# EAGLE board MPPT_Charger_20A (EAGLE 7.7.0)
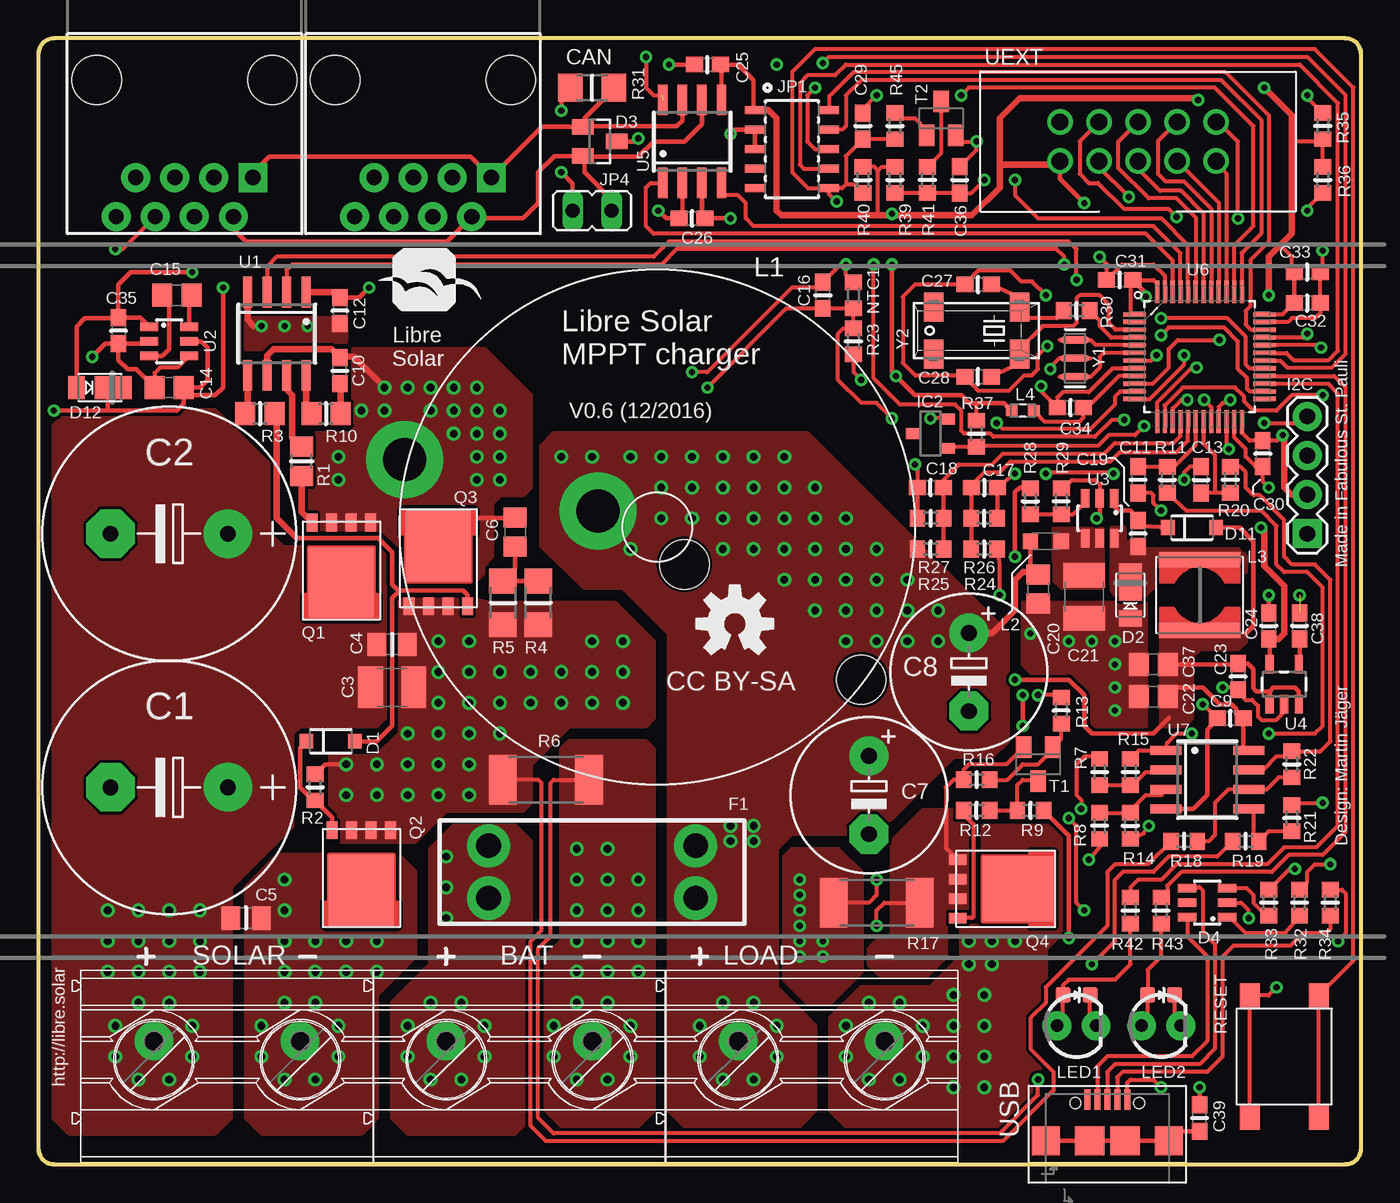
[diagram p0: board, top side]
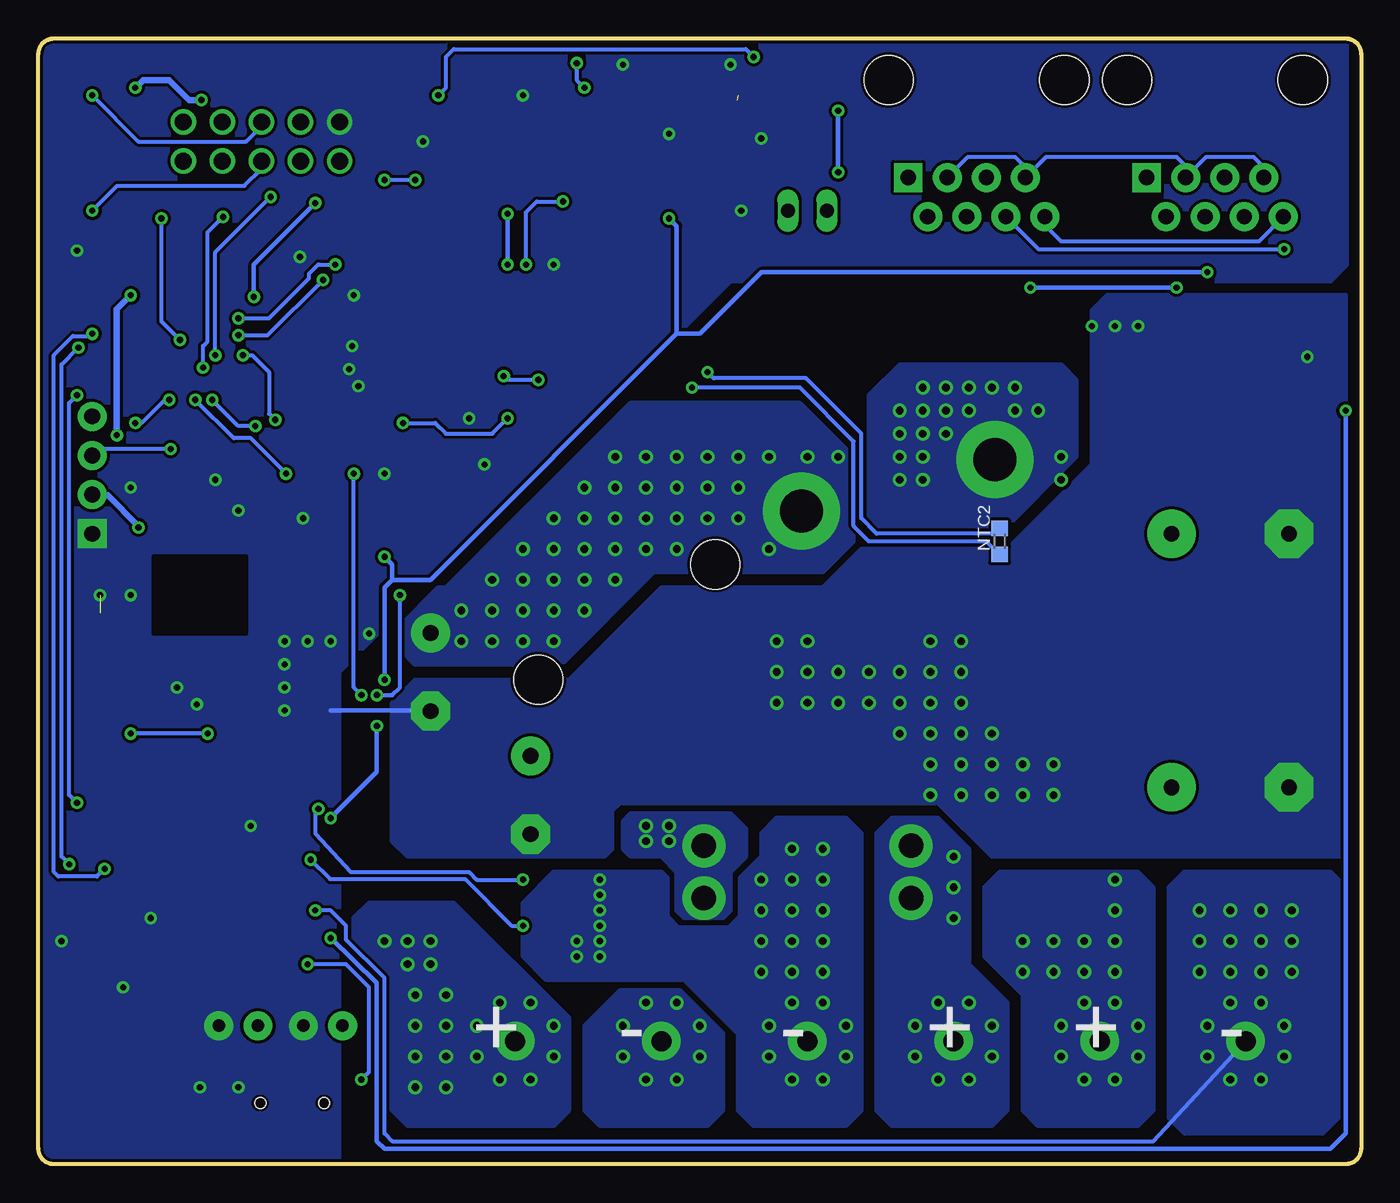
[diagram p1: board, bottom side, seen from below]

Size 86 x 73.2 mm. Coordinates in mm from the lower left corner, seen from the top.
Outline: 86,1 86,72.2 arc90 85,73.2 1,73.2 arc90 0,72.2 0,1 arc90 1,0 85,0 arc90 86,1
Copper layers (1*16): Top 0.035mm / dielectric 1.55mm / Bottom 0.035mm
Design rules "Multi-CB_2L_200um-Tracks_OL70um": minimum track width 0.2mm, minimum drill 0.2mm, track to track 0.2mm, track to pad 0.2mm, pad to pad 0.2mm, via to via 0.2mm, smd to smd 0mil, copper to edge 0.2mm, drill to drill 0.2mm, minimum pad ring 0.2mm, minimum via ring 0.2mm, stop-mask expansion 2mil, vias tented up to drill 0.45mm, thermal gap 0.2mm
Net classes: 1 power: width 0.305 mm, drill 0.3 mm, clearance 0.152 mm; 2 VIN: width 0.203 mm, drill 0.3 mm, clearance 0.152 mm
Holes 3.2 mm at 53.5,31.5 42,39
bRestrict: area 72.5,34.5 to 78.5,39.5

## Footprints (pad centres in the part's own frame; a part is rotated, then mirrored left to right if it is on the bottom)
MKDS_5/2-952 = drill 1.3 pad 2.5: 1 0,0; 2 9.5,0
E7,5-16 = drill 1.016 pad 3.15: + -3.81,0 | drill 1.016 pad 3.15 octagon: - 3.81,0
C1210 = smd 1.6 x 2.7: 1 -1.4,0; 2 1.4,0
C0805 = smd 1.2 x 1.5: 1 -1,0; 2 1,0
C0805' = smd 1.3 x 1.5: 1 -0.95,0; 2 0.95,0
E5-10,5 = drill 1.016 pad 2.54: + -2.54,0 | drill 1.016 pad 2.54 octagon: - 2.54,0
C0603 = smd 1.1 x 1: 1 -0.85,0; 2 0.85,0
SOD-123 = smd 0.9 x 0.95: A 1.575,0; C -1.575,0
POWERDI123 = smd 1.05 x 1.5: A -1.525,0 | smd 2.4 x 1.5: C 0.85,0
SOT23 = smd 1 x 1.4: 1 -0.95,-1.1; 2 0.95,-1.1; 3 0,1.1
SOT23-6 = smd 0.55 x 1.2: 1 0.95,1.3; 2 0,1.3; 3 -0.95,1.3; 4 -0.95,-1.3; 5 0,-1.3; 6 0.95,-1.3
LED-0603 = smd 1 x 1: A 0,-0.877; C 0,0.877
KEYSTONE-FUSE-3557-2 = drill 1.6 pad 2.8: P$1 -6.735,1.7; P$2 -6.735,-1.7; P$3 6.735,1.7; P$4 6.735,-1.7
1X04 = drill 1.016 pad 1.88 square: 1 0,0 | drill 1.016 pad 1.88: 2 2.54,0; 3 5.08,0; 4 7.62,0
DBZ_R-PDSO-G3 = smd 0.7 x 1: 1 -0.95,-1.1; 2 0.95,-1.1; 3 0,1.1
SAMTECH_FTSH-105-01 = smd 0.508 x 1.27: 1 -2.54,-2.413; 2 -2.54,2.413; 3 -1.27,-2.413; 4 -1.27,2.413; 5 0,-2.413; 6 0,2.413; 7 1.27,-2.413; 8 1.27,2.413; 9 2.54,-2.413; 10 2.54,2.413
RJ45-8 = drill 1 pad 1.88 square: 1 -4.445,6.35 | drill 1 pad 1.88: 2 -3.175,8.89; 3 -1.905,6.35; 4 -0.635,8.89; 5 0.635,6.35; 6 1.905,8.89; 7 3.175,6.35; 8 4.445,8.89 | hole 3.2: -5.715,0; 5.715,0
JP1 = drill 0.914 long: 1 0,-1.27; 2 0,1.27
L-FERYSTER-DTMSS-27/0,033/20 = drill 2.8 pad 5: P$1 -17,0; P$2 -4,0
L2012C = smd 1 x 1: 1 -1,0; 2 1,0
WE-TPC_4818/4828 = smd 1 x 5.3: 1 -2.3,0; 2 2.3,0
WE-CBA_0603(W=2.2) = smd 0.75 x 0.7: 1 -0.725,0; 2 0.725,0
LED3MM = drill 0.813 pad 1.88: A -1.27,0; K 1.27,0
R0603@1 = smd 1 x 1.1: 1 -0.85,0; 2 0.85,0
5X6_MOSFET = smd 4.2 x 4.6: D 0,1.2 | smd 0.7 x 1.15: G 1.905,-2.725; S1 -1.905,-2.725; S2 -0.635,-2.725; S3 0.635,-2.725
R0805 = smd 1.3 x 1.5: 1 -0.95,0; 2 0.95,0
R0603 = smd 1 x 1.1: 1 -0.85,0; 2 0.85,0
R1206 = smd 1.6 x 1.803: 1 -1.422,0; 2 1.422,0
R2512 = smd 1.8 x 3.2: 1 -2.8,0; 2 2.8,0
430182050816 = smd 1.55 x 1.3: 1 -3.975,2.25; 2 -3.975,-2.25; 3 3.975,2.25; 4 3.975,-2.25
SOT23-BEC = smd 1 x 1.4: B -0.95,-1.1; C 0,1.1; E 0.95,-1.1
SOIC-8-N = smd 0.6 x 2: 1 -1.905,-2.7; 2 -0.635,-2.7; 3 0.635,-2.7; 4 1.905,-2.7; 5 1.905,2.7; 6 0.635,2.7; 7 -0.635,2.7; 8 -1.905,2.7
SOT23-5 = smd 0.55 x 1.2: 1 -0.95,-1.3; 2 0,-1.3; 3 0.95,-1.3; 4 0.95,1.3; 5 -0.95,1.3
LQFP48 = smd 1.473 x 0.279: 1 -4.216,2.743; 2 -4.216,2.261; 3 -4.216,1.753; 4 -4.216,1.245; 5 -4.216,0.762; 6 -4.216,0.254; 7 -4.216,-0.254; 8 -4.216,-0.762; 9 -4.216,-1.245; 10 -4.216,-1.753; 11 -4.216,-2.261; 12 -4.216,-2.743; 25 4.216,-2.743; 26 4.216,-2.261; 27 4.216,-1.753; 28 4.216,-1.245; 29 4.216,-0.762; 30 4.216,-0.254; 31 4.216,0.254; 32 4.216,0.762; 33 4.216,1.245; 34 4.216,1.753; 35 4.216,2.261; 36 4.216,2.743 | smd 0.279 x 1.473: 13 -2.743,-4.216; 14 -2.261,-4.216; 15 -1.753,-4.216; 16 -1.245,-4.216; 17 -0.762,-4.216; 18 -0.254,-4.216; 19 0.254,-4.216; 20 0.762,-4.216; 21 1.245,-4.216; 22 1.753,-4.216; 23 2.261,-4.216; 24 2.743,-4.216; 37 2.743,4.216; 38 2.261,4.216; 39 1.753,4.216; 40 1.245,4.216; 41 0.762,4.216; 42 0.254,4.216; 43 -0.254,4.216; 44 -0.762,4.216; 45 -1.245,4.216; 46 -1.753,4.216; 47 -2.261,4.216; 48 -2.743,4.216
UEXT = drill 1.1: 1 -1.27,5.08; 2 1.27,5.08; 3 -1.27,2.54; 4 1.27,2.54; 5 -1.27,0; 6 1.27,0; 7 -1.27,-2.54; 8 1.27,-2.54; 9 -1.27,-5.08; 10 1.27,-5.08
USB_MICRO_B_5 = smd 0.4 x 1.35: 1 -1.3,0; 2 -0.65,0; 3 0,0; 4 0.65,0; 5 1.3,0 | smd 1.8 x 1.9: Z1 -4,-2.675; Z4 4,-2.675 | smd 1.9 x 1.9: Z2 -1.15,-2.675; Z3 1.15,-2.675 | hole 0.7: -2.075,-0.225; 2.075,-0.225
RESONATOR-SMD-1:1 = smd 0.45 x 1.905: 1 -1.2,0; 2 0,0; 3 1.2,0
MM20SS = smd 1.27 x 1.88: 1 -2.794,-1.524; 2 2.794,-1.524; 3 2.794,1.524; 4 -2.794,1.524

## Placement (x,y rotation side)
BAT  MKDS_5/2-9,52  [MKDS_5/2-952]  26.5,8 0 top
C1  1000µ  [E7,5-16]  8.5,24.5 180 top
C2  1000µ  [E7,5-16]  8.5,41 180 top
C3  2.2µ  [C1210]  23,31 0 top
C4  1µ  [C0805]  23,33.8 0 top
C5  1µ  [C0805]  13.5,16 0 top
C6  1n  [C0805']  31,41.1 270 top
C7  820µ  [E5-10,5]  54,24 270 top
C8  820µ  [E5-10,5]  60.5,32 270 top
C9  100n  [C0603]  77.5,29 180 top
C10  100n  [C0603]  19.6,51.6 90 top
C11  100n  [C0603]  71.5,44.5 270 top
C12  1µ  [C0603]  19.6,55.5 270 top
C13  100n  [C0603]  75.6,44.5 90 top
C14  10µ  [C0805']  8.5,50.5 180 top
C15  10µ  [C0805']  9,56.5 180 top
C16  100n  [C0603]  51,56.5 90 top
C17  100n  [C0603]  61.5,44 0 top
C18  100n  [C0603]  58,44 180 top
C19  100n  [C0603]  71.5,41 270 top
C20  1µ  [C0805']  65,37.4 270 top
C21  4.7µ  [C1210]  68,36.9 270 top
C22  10µ  [C0805']  72.5,30.4 180 top
C23  1µ  [C0603]  78,31.7 270 top
C24  2.2µ  [C0603]  80,35 90 top
C25  100n  [C0603]  43.5,71.5 180 top
C26  100n  [C0603]  42.5,61.5 180 top
C27  4.3p  [C0603]  61.1,57.2 180 top
C28  4.3p  [C0603]  61.1,51.2 180 top
C29  100n  [C0603]  53.6,67.5 90 top
C30  100n  [C0603]  79.6,46.2 270 top
C31  100n  [C0603]  70.3,57.5 180 top
C32  100n  [C0603]  82.5,56 0 top
C33  2.2µ  [C0603]  82.5,58 0 top
C34  100n  [C0603]  67.1,49.2 180 top
C35  1µ  [C0603]  5.2,54.2 270 top
C36  2.2µ  [C0603]  59.9,64 90 top
C37  10µ  [C0805']  72.5,32.5 180 top
C38  100p  [C0603]  82,35 90 top
C39  DNP  [C0603]  75.5,3 90 top
D1  1N4148W-7-F  [SOD-123]  19,27.5 0 top
D2  SS16FP  [POWERDI123]  71,37 90 top
D3  NUP2105L  [SOT23]  36.5,66.5 270 top
D4  [SOT23-6]  76,17 270 top
D6  [LED-0603]  67.5,11 270 top
D8  [LED-0603]  73,11 270 top
D11  1N4148W-7-F  [SOD-123]  75,41.4 0 top
D12  SS16FP  [POWERDI123]  4,50.5 0 top
F1  25A  [KEYSTONE-FUSE-3557-2]  36,19 0 top
I2C  [1X04]  82.5,41 90 top
IC2  LM4040CYM3-2.5  [DBZ_R-PDSO-G3]  58,47.5 90 top
JP1  CORTEX_DEBUGSMD  [SAMTECH_FTSH-105-01]  49,66 270 top
JP2  RJ45  [RJ45-8]  9.5,70.5 180 top
JP3  RJ45  [RJ45-8]  25,70.5 180 top
JP4  [JP1]  36,62 270 top
L1  22µ  [L-FERYSTER-DTMSS-27/0,033/20]  40.24,41.42 345 top
L2  4.7uH  [L2012C]  65.5,40.5 180 top
L3  22µH  [WE-TPC_4818/4828]  75.5,37 270 top
L4  [WE-CBA_0603(W=2.2)]  64,49 180 top
LED1  [LED3MM]  67.5,9 0 top
LED2  [LED3MM]  73,9 0 top
LOAD  MKDS_5/2-9,52  [MKDS_5/2-952]  45.5,8 0 top
N1  OSHW-LOGOM  [OSHW-LOGO-M]  45.28,35.13 0 top
NTC1  NTC10k  [R0603@1]  53,56.5 90 top
NTC2  NTC10k  [R0603@1]  23.5,40.5 90 bottom
Q1  CSD18540Q5B  [5X6_MOSFET]  19.7,39 180 top
Q2  CSD18540Q5B  [5X6_MOSFET]  21,19 180 top
Q3  CSD18540Q5B  [5X6_MOSFET]  26,39 0 top
Q4  CSD18540Q5B  [5X6_MOSFET]  62.5,17.9 270 top
R1  3.3  [R0805]  17.1,45.7 270 top
R2  1M  [R0603]  18,24.5 90 top
R3  3.3  [R0805]  14.4,48.8 0 top
R4  4.7  [R1206]  32.5,36.5 90 top
R5  4.7  [R1206]  30.2,36.5 90 top
R6  2m  [R2512]  33,25 0 top
R7  2.2k  [R0603]  69,25.5 90 top
R8  2.2k  [R0603]  69,22 270 top
R9  33k  [R0603]  64.5,23 180 top
R10  3.3  [R0805]  18.7,48.8 0 top
R11  1k  [R0603]  73.4,44.5 90 top
R12  2.2k  [R0603]  61,23 180 top
R13  2.2k  [R0603]  66.5,29.5 270 top
R14  150k  [R0603]  71,22 90 top
R15  150k  [R0603]  71,25.5 90 top
R16  10k  [R0603]  61,25 0 top
R17  2m  [R2512]  54.5,17 0 top
R18  2.2k  [R0603]  74.5,21 180 top
R19  2.2k  [R0603]  78.5,21 180 top
R20  1k  [R0603]  77.5,44.5 270 top
R21  150k  [R0603]  81.5,22.5 270 top
R22  150k  [R0603]  81.5,26 90 top
R23  10k  [R0603]  53,53.5 270 top
R24  100k  [R0603]  61.5,40 0 top
R25  100k  [R0603]  58,40 180 top
R26  5.6k  [R0603]  61.5,42 180 top
R27  10k  [R0603]  58,42 0 top
R28  52.3k  [R0603]  64.5,43.1 90 top
R29  10k  [R0603]  66.5,43.1 270 top
R30  0  [R0603]  67.5,55.5 180 top
R31  120  [R1206]  36,70 180 top
R32  0  [R0603]  82,17 270 top
R33  0  [R0603]  80,17 270 top
R34  100k  [R0603]  84,17 270 top
R35  2.2k  [R0603]  83.5,67.5 270 top
R36  2.2k  [R0603]  83.5,64 90 top
R37  10k  [R0603]  61,47.5 90 top
R39  1M  [R0603]  55.7,64 90 top
R40  1M  [R0603]  53.6,64 90 top
R41  2.2k  [R0603]  57.8,64 270 top
R42  330  [R0603]  71,16.5 90 top
R43  330  [R0603]  73,16.5 90 top
R45  56k  [R0603]  55.7,67.5 90 top
RESET  [430182050816]  81,7 270 top
SOLAR  MKDS_5/2-9,52  [MKDS_5/2-952]  7.5,8 0 top
T1  MMBT3904  [SOT23-BEC]  65,26 180 top
T2  MMBT3904  [SOT23-BEC]  58.7,68 0 top
U1  LM5107  [SOIC-8-N]  15.5,54 180 top
U2  LM2665  [SOT23-6]  8.5,53.5 90 top
U3  MCP16331-CH  [SOT23-6]  69,42 0 top
U4  AP2210-3.3  [SOT23-5]  81,31.2 0 top
U5  TJA1042T/3  [SOIC-8-N]  42.5,66.5 0 top
U6  STM32F072CB  [LQFP48]  75.5,52.5 0 top
U7  LM358A  [SOIC-8-N]  76,25 270 top
U$1  LIBRESOLAR_LOGO  [LIBRESOLAR_LOGO]  23.1,55.5 0 top
UEXT  UEXT  [UEXT]  71.5,66.5 90 top
USB  USB_MICRO_B  [USB_MICRO_B_5]  69.5,4.2 0 top
Y1  8MHz  [RESONATOR-SMD-1:1]  67.4,52.4 270 top
Y2  ABS25-32.768KHZ-6-T  [MM20SS]  61,54.2 180 top

## Library data of the parts
BAT SOLAR = resolut; MF_ALT: WURTH ELEKTRONIK; MPN_ALT: 691250910002; OC_FARNELL: unknown
C1 C2 = rcl; MPN: EKYB630ELL102ML25S; OC_FARNELL: unknown
C3 C6-C8 C20 = rcl; OC_FARNELL: unknown
C4 C5 C9-C13 C16-C19 C23 C25-C32 C34 C35 C38 C39 JP1 L1 R2 R4 R5 R7-R9 R11-R16 R18-R27 R29-R37 R39-R43 U1 U2 U5 U7 U$1 UEXT = LibreSolar; OC_FARNELL: unknown
C14 C15 C22 C37 = rcl; MF: MURATA; MPN: GRM21BR61E106KA73L; OC_FARNELL: 1735530
C21 = rcl; MF: MURATA; MPN: GRM31CR71H475KA12L; OC_FARNELL: 1735545
C24 C33 C36 = LibreSolar; MF: AVX; MPN: 0805YC475KAT2A; OC_FARNELL: 1657937
D1 D11 = SparkFun-DiscreteSemi; MF: MULTICOMP; MPN: 1N4148W; OC_FARNELL: 1621821
D2 D12 = resolut; MF: DIODES INC.; MPN: DFLS1100-7; OC_FARNELL: 1713889
D3 = LibreSolar; MF: ON SEMICONDUCTOR; MPN: NUP2105LT1G; OC_FARNELL: 2101833
D4 = LibreSolar; MF: WURTH ELEKTRONIK; MPN: 82400102; OC_FARNELL: 1825875
D6 D8 LED1 LED2 = SparkFun-LED; OC_FARNELL: unknown
F1 = LibreSolar; MF: KEYSTONE; MPN: 3557-2; OC_FARNELL: 2292904
I2C = SparkFun-Connectors; OC_FARNELL: unknown
IC2 = texas; MF: MICROCHIP; MPN: LM4040DYM3-2.5-TR; OC_FARNELL: 2509865; OC_NEWARK: 58K5875
JP2 JP3 = SparkFun-Connectors; MF: AMPHENOL COMMERCIAL PRODUCTS; MPN: RJHSE-5080; OC_FARNELL: 1860577; PROD_ID: CONN-08506
JP4 = jumper; OC_FARNELL: unknown
L2 = rcl; MF: WURTH ELEKTRONIK; MPN: 74476404; OC_FARNELL: 2471630
L3 = PowerMagnetics; MF: WURTH ELEKTRONIK; MPN: 744043470; OC_FARNELL: 1890607
L4 = EAGLE-EMC_COMPONENTS-rev16f; OC_FARNELL: unknown
LOAD N1 = resolut; OC_FARNELL: unknown
NTC1 NTC2 = LibreSolar; MF: TDK; MPN: NTCG163JF103FT1S; OC_FARNELL: 2066284
Q1-Q4 = LibreSolar; MF: TEXAS INSTRUMENTS; MPN: CSD18540Q5BT; OC_FARNELL: 2447870
R1 R3 R10 R28 R45 = LibreSolar; MF: BOURNS; MPN: CR0805-FX-1001ELF; OC_FARNELL: 2008380
R6 R17 = rcl; MF: BOURNS; MPN: CRE2512-FZ-R002E-3
RESET = EAGLE-TACT_SWITCHES-rev16e; MF: WURTH ELEKTRONIK; MPN: 430182050816; OC_FARNELL: 2065106
T1 T2 = transistor; MF: DIODES INC.; MPN: MMBT3904-7-F; OC_FARNELL: 1773602
U3 = LibreSolar; MF: MICROCHIP; MPN: MCP16331T-E/CH; OC_FARNELL: 2448515
U4 = LibreSolar; MF: MICROCHIP; MPN: MIC5225-3.3YM5-TR; OC_FARNELL: 2510262; PROD_ID: VREG-00822; VALUE: 3.3V/150mA
U6 = LibreSolar; MF: STMICROELECTRONICS; MPN: STM32F100C4T6B; OC_FARNELL: 1838504; OC_NEWARK: 86R1309; PACKAGE: LQFP-48; SUPPLIER: STMircroelectronics
USB = LibreSolar; MF: FCI; MF_ALT: Würth; MPN: 10118192-0001LF; MPN_ALT: 629105136821; OC_FARNELL: 2506568
Y1 = Testing; MF: MURATA; MPN: CSTCE8M00G55-R0; OC_FARNELL: 2443270
Y2 = crystal; MF: ABRACON; MPN: ABS25-32.768KHZ-T; OC_FARNELL: 1611824; OC_NEWARK: unknown

## Nets
!LOAD_EN!: R13.1 U6.20
!RESET: C29.1 JP1.10 R40.1 R45.1 RESET.1 RESET.3 U6.7
+3V3: C24.1 C25.1 C30.1 C31.1 C32.1 C33.1 I2C.2 JP1.1 L4.2 R23.2 R35.2 R36.2 R37.2 R39.2 R40.2 U4.5 U5.5 U6.1 U6.24 U6.36 U6.48 UEXT.1
+5V [power]: C9.1 C22.1 C23.1 C26.1 C35.1 C37.1 D11.A D12.A L3.2 R28.2 U2.1 U4.1 U4.3 U5.3 U7.8
+10V [VIN]: C12.1 C14.1 D12.C R9.1 U1.1 U2.5
BAT+ [VIN]: BAT.1 F1.P$1 F1.P$2
BAT-: BAT.2 R6.2 R7.2 R17.1 R19.2
BAT-1: Q4.S1 Q4.S2 Q4.S3 R8.2 R16.1 R17.2 T1.E
BOOT0: C36.1 R39.1 R41.2 U6.44
CAN_GND: JP2.3 JP2.7 JP3.3 JP3.7
CAN_H: D3.1 JP2.1 JP3.1 R31.1 U5.7
CAN_L: D3.2 JP2.2 JP3.2 JP4.2 U5.6
CAN_RX: U5.4 U6.45
CAN_SHLD: JP2.6 JP3.6
CAN_STB: U5.8 U6.38
CAN_TX: U5.1 U6.46
CAN_V+: JP2.8 JP3.8
DCDC_IN: C1.+ C2.+ C3.1 C4.1 C5.1 Q1.D R24.2 SOLAR.1
DCDC_OUT [VIN]: C7.+ C8.+ C20.1 F1.P$3 F1.P$4 L1.P$2 L2.2 LOAD.1 R25.2
GND: C1.- C2.- C3.2 C4.2 C7.- C8.- C9.2 C11.2 C12.2 C13.2 C14.2 C16.2 C17.2 C18.2 C20.2 C21.2 C22.2 C23.2 C24.2 C25.2 C26.2 C27.2 C28.2 C29.2 C30.2 C31.2 C32.2 C33.2 C34.2 C35.2 C36.2 C37.2 C38.2 C39.2 D2.A D3.3 D4.2 D6.C D8.C I2C.1 IC2.2 JP1.3 JP1.5 LED1.K LED2.K NTC1.2 NTC2.2 Q2.S1 Q2.S2 Q2.S3 Q3.S1 Q3.S2 Q3.S3 R2.2 R4.1 R5.1 R6.1 R14.1 R18.2 R26.1 R27.1 R29.1 R34.1 RESET.2 RESET.4 T2.E U1.4 U2.2 U2.4 U3.2 U4.2 U5.2 U6.8 U6.23 U6.35 U6.47 U7.4 UEXT.2 USB.5 Y1.2
HB: R10.1 U1.8
HS_DRV: R1.1 U1.7
I2C1_SCL: R36.1 U6.42 UEXT.5
I2C1_SDA: R35.1 U6.43 UEXT.6
I2C2_SCL: I2C.4 U6.21
I2C2_SDA: I2C.3 U6.22
I_DCDC: C13.1 R20.2 U6.19
I_LOAD: C11.1 R11.2 U6.18
LED1: R42.2 U6.27
LED2: R43.2 U6.28
LOAD-: LOAD.2 Q4.D
LOAD_G: Q4.G R12.2
LS_DRV: R3.1 U1.5
N$2: C10.1 R10.2
N$3: D4.1 R32.2
N$4: D1.C Q2.G R2.1
N$5: R45.2 T2.B
N$6: R20.1 R22.2 U7.7
N$7: R30.1 U6.4
N$8: D4.3 R33.2
N$9: D1.A Q3.G R3.2
N$10: D4.4 USB.3
N$11: R9.2 R12.1 T1.C
N$12: C6.2 R4.2 R5.2
N$13: C15.1 U2.6
N$14: C15.2 U2.3
N$15: C27.1 R30.2 Y2.1
N$16: R28.1 R29.2 U3.3
N$17: C28.1 U6.3 Y2.4
N$18: R19.1 R21.2 U7.5
N$19: R8.1 R14.2 U7.3
N$20: Q1.G R1.2
N$21: R41.1 T2.C
N$22: C19.1 D11.C U3.1
N$23: R18.1 R22.1 U7.6
N$24: R13.2 R16.2 T1.B
N$25: C19.2 D2.C L3.1 U3.6
N$26: C21.1 L2.1 U3.4 U3.5
N$27: D4.6 USB.2
N$28: C38.1 U4.4
N$29: R34.2 USB.4
N$30: C39.1 USB.Z1 USB.Z2 USB.Z3 USB.Z4
N$36: R11.1 R15.2 U7.1
N$40: JP4.1 R31.2
N$43: D6.A LED1.A R42.1
N$46: D8.A LED2.A R43.1
N$99: R7.1 R15.1 U7.2
OSC_IN: U6.5 Y1.1
OSC_OUT: U6.6 Y1.3
REF_I_DCDC: R21.1 U6.14
SOLAR-: C5.2 Q2.D SOLAR.2
SPI1_MISO: U6.40 UEXT.7
SPI1_MOSI: U6.41 UEXT.8
SPI1_SCK: U6.39 UEXT.9
SSEL: U6.10 UEXT.10
SW_NODE: C6.1 C10.2 L1.P$1 Q1.S1 Q1.S2 Q1.S3 Q3.D U1.6
SWCLK: JP1.4 U6.37
SWDIO: JP1.2 U6.34
TEMP: C16.1 NTC1.1 NTC2.1 R23.1 U6.11
TIM1_CH1: U1.2 U6.29
TIM1_CH1N: U1.3 U6.26
USART1_RX: JP1.8 U6.31
USART1_TX: JP1.6 U6.30
USART2_RX: U6.13 UEXT.4
USART2_TX: U6.12 UEXT.3
USB_DM: R32.1 U6.32
USB_DP: R33.1 U6.33
V_BAT: C18.1 R25.1 R27.2 U6.16
V_REF: IC2.1 R37.1 U6.15
V_SOLAR: C17.1 R24.1 R26.2 U6.17
VCC: USB.1
VDD: D4.5
VDDA: C34.1 L4.1 U6.9

## Tracks (layer width: path | path; a pad name or v marks a point on that pad's centre or on a via)
!LOAD_EN!  (via drill 0.4)
  Top 0.254: v65.5,44.9 65.5,45 69.5,45 v69.9,44.9 | R13.1 66.35,30.5 v65,30.5 | U6.20 76.26,49.24 v75.8,49.7
  Bottom 0.254: v65,30.5 65.5,31 v65.5,44.9 | v69.9,44.9 72.2,47.2 73.3,47.2 v75.8,49.7
!RESET  (via drill 0.4)
  Top 0.254: RESET.3 RESET.1 85.5,13.22 85.5,70 83,72.5 50.5,72.5 49,71 49,64.5 50.04,63.46 JP1.10 | R45.1 C29.1 52.5,65.55 52.5,63.7 | 52.5,63.7 52.26,63.46 JP1.10 | R40.1 53.05,63.7 52.5,63.7 | v54.3,58.5 54.3,51.1 56,49.4 59.6,49.4 60,49 60,47.7 60.2,47.5 61.9,47.5 62.1,47.3 68.7,47.3 69.8,48.4 v70.6,48.4 | v51.9,62.6 51.41,63.09 JP1.10 | U6.7 72.35,52.25 v72.7,52.6
  Bottom 0.254: v54.3,58.5 54.3,61.9 53.6,62.6 v51.9,62.6 | v72.7,52.6 72.1,52.6 71,51.5 71,48.8 v70.6,48.4
+3V3  (via drill 0.4)
  Top 0.254: C32.1 80.89,55.24 U6.36 | C33.1 81.5,58.15 81.5,59 80.75,59.75 | C31.1 72.5,57.5 72.76,57.24 U6.48 | 54.6,61.7 54.6,64.6 | 54.6,64.6 54.35,64.85 R40.2 | 54.6,64.6 54.85,64.85 R39.2 | U6.24 78.24,47.56 78.75,47.05 C30.1 80.55,47.05 v80.9,47.4 | R37.2 61,49.5 | 81.5,66.5 83.35,66.5 R35.2 R36.2 | 71.28,57.37 71.07,57.37 71,57.3 71,55.24 U6.1 | R23.2 53,51.5 v53.5,51
  Top 0.305: U5.5 44.41,71.44 C25.1 45.5,71.5 46.5,70.5 46.5,68.63 JP1.1 | 81.7,57.95 C33.1 C32.1 | U4.5 80.05,34.1 C24.1 | L4.2 62.77,49.5 61,49.5 60.5,49.5 60,50 57,50 v55.75,51.25 55.5,51.5 v55.5,58.5 | v68,62.5 66.42,64.08 UEXT.1 | v72,56.4 72,56.65 71.28,57.37 C31.1
  Top 0.406: C24.1 80.65,34.15 81,34.5 81,37.6 79.7,38.9 79.7,41.2 v79.5,41.4 | I2C.2 81.46,43.54 81,44 81,47.3 v80.9,47.4 | v80,56.5 80,59 80.75,59.75 81.5,60.5 81.5,66.5 81.5,68.2 v79.7,70 | 62.5,65 62.5,68 63.8,69.3 75.3,69.3 v75.4,69.2 | 62.5,65 62.5,63.5 60.7,61.7 55.6,61.7 v55.5,61.8 55.4,61.7 54.6,61.7 48.3,61.7 48,62 48,68 47.46,68.54 JP1.1 | UEXT.1 66.19,65 62.5,65
  Bottom 0.254: v53.5,51 55.5,51 v55.75,51.25
  Bottom 0.305: v55.5,58.5 v55.5,61.8 | v72,56.4 72,58.5 v68,62.5
  Bottom 0.406: v79.5,41.4 79.5,41.5 81.5,43.5 82.46,43.5 I2C.2 | v80.9,47.4 80.9,55.6 v80,56.5 | v79.7,70 79.2,70.5 77.5,70.5 76.2,69.2 v75.4,69.2
+5V  (via drill 0.4)
  Top 0.305: D11.A 78.1,41.4 79,40.5 79,35 78.5,34.5 | U5.3 43.13,61.72 C26.1 v45,61.5 | U4.3 81.95,30.75 81.7,31 80.3,31 80.05,30.75 | 80.05,30.75 U4.1 80.05,30.3 | v63.5,31.5 67,31.5 68,30.5 68,28.5 68.5,28 72.5,28 73.5,29 | U7.8 78.35,27.16 C9.1 77.9,29.25 77.9,29.6 77.6,29.9 76.8,29.9 75.7,31 73.5,31 | C37.1 77.85,32.5 C23.1 78.65,32.55 79,32.2 79,30.95 79.2,30.75 80.05,30.75 | R28.2 64.35,44 63.8,44 63.5,43.7 v63.5,39.5 | U2.1 6.6,55.05 C35.1 | C35.1 5.15,55 3,55 2.48,54.48 D12.A | v10,58 6,58 5.2,57.2 C35.1
  Bottom 0.305: v63.5,31.5 63.5,37.5 63,38 | 44.5,54 44.5,61 v45,61.5 | 63,38 60.5,38 44.5,54 | v63.5,39.5 63,39 63,38 | v10,58 39,58 43,54 44.5,54
  pour Top (no thermals): 73,28.5 73,34.5 78.5,34.5 78.5,34 78,33.5 75.5,33.5 75,33 75,29 74.5,28.5
+10V  (via drill 0.4)
  Top 0.305: v67,14.7 67,21.35 R9.1 | U2.5 10.6,53.5 11,53.1 11,51 10.5,50.5 C14.1 9.45,50 | v1,49 4.5,49 | 4.5,49 9,49 9.45,49.45 9.45,50 | D12.C 4.5,50.15 4.5,49 | 9.45,50 11.5,50 12,50.5 v12,57 | v21.5,57 20.85,56.35 C12.1
  Top 0.406: C12.1 19.25,56.7 U1.1
  Bottom 0.305: v1,49 1,2 2,1 63.5,1 64,1.5 64,11.8 v67,14.7 | v12,57 v21.5,57
BAT+  (via drill 0.5)
  other vias: 27.5,10.5 29,9 29,7 27.5,5.5 25.5,5.5 24,7 24,9 25.5,10.5 26.5,20 26.5,18 26.5,16
  pour Top (no thermals): 24,2 31,2 32,3 32,21 31,22 27,22 25.5,20.5 25.5,13 23,10.5 23,3
  pour Bottom (no thermals): 24,2.5 23,3.5 23,10.5 25.5,13 25.5,20.5 27.5,22.5 30.5,22.5 31.5,21.5 31.5,3.5 30.5,2.5
BAT-  (via drill 0.4, 0.5)
  Top 0.254: R6.2 33.5,25 33.3,24.8 33.3,14.8 32.5,14 32.5,3 33.5,2 62.5,2 65,4.5 v65,5.5 | R19.2 76.65,20 73.5,20 72.5,19 70.5,19 70,18.5 70,14.5 v68.5,13 | R7.2 68.85,26.5 68,26.5 67.5,26 67.5,24 67.8,23.7 v67.8,23.1 | v54.5,18.5 54.5,17.5 54,17 R17.1
  Bottom 0.254: v65,5.5 64.5,6 64.5,11.5 66,13 v68.5,13 | v67.8,23.1 68,22.9 68,21.5 65.7,19 58,19 57.5,18.5 v54.5,18.5
  other vias: 49.5,18.5 49.5,17.5 49.5,16.5 49.5,15.5 49.5,14.5 49.5,13.5 51,14.5 51,13.5 33.5,9 35,10.5 37,10.5 38.5,9 38.5,7 37,5.5 35,5.5 33.5,7 35,12.5 37,12.5 37,14.5 37,16.5 37,18.5 37,20.5 35,14.5 35,16.5 35,18.5 35,20.5 39,12.5 39,14.5 39,16.5 39,18.5
  pour Top (no thermals): 34,27 34,14.5 33,13.5 33,3.5 34,2.5 39,2.5 40,3.5 40,27 39.5,27.5 34.5,27.5
  pour Bottom (no thermals): 33.5,2.5 32.5,3.5 32.5,21.5 33.5,22.5 38,22.5 39,21.5 39,20 40.4,18.6 40.4,16.1 41.1,15.4 44.4,15.4 45.1,16.1 45.1,18.6 45.5,19 52.5,19 54.5,17 54.5,13.5 53,12 44,12 40.5,8.5 40.5,3.5 39.5,2.5
  pour Top (no thermals): 48.5,12 48.5,20 49,20.5 52,20.5 53.5,19 53.5,12.5 51.5,10.5 50,10.5
BAT-1  (via drill 0.4)
  Top 0.254: Q4.S1 59,20.58 59,24.5 59.5,25 R16.1 60.15,25.65 60.5,26 62.95,26 T1.E | R8.2 69.15,20.8 v68.3,19.8 | v54.5,15.5 54.5,16.5 55,17 R17.2
  Bottom 0.254: v68.3,19.8 67.03,18.54 58.27,18.54 55.24,15.5 v54.5,15.5
  pour Top (no thermals): 54,13 54,14 54.5,14.5 55,14.5 55.5,15 55.5,21 57.5,23 60.5,23 60.5,16.5 59,16.5 59,13.5 57.7,12.2 54.8,12.2
BOOT0  (via drill 0.4)
  Top 0.254: U6.44 74.74,59.76 73,61.5 65,61.5 63.5,63 v63.5,64 | R39.1 R41.2 C36.1 60.65,63.15 v61.5,64
  Bottom 0.254: v61.5,64 v63.5,64
CAN_GND
  Bottom 0.254: JP3.3 25.55,65.5 22.5,65.5 21.82,64.83 JP3.7 20.48,65.5 12,65.5 11.4,64.91 JP2.3 10.05,65.5 7,65.5 6.33,64.83 JP2.7
CAN_H
  Top 0.305: U5.7 41.87,67.86 41.5,67.5 35.45,67.5 D3.1 | D3.1 32.74,67.45 JP3.1 28.09,65.5 15,65.5 13.95,64.44 JP2.1 | R31.1 37.42,69.92 35.5,68 35.5,67.55 D3.1
CAN_L
  Top 0.305: U5.6 43.13,67.64 42,66.5 40,66.5 39,65.5 35.45,65.5 D3.2 | D3.2 33.55,65.55 32.5,64.5 32.5,62.5 31.5,61.5 28.29,61.5 JP3.2 26.57,60 13.5,60 12.68,60.83 JP2.2 | JP4.2 37.27,62.73 35.5,64.5 35.5,65.45 D3.2
CAN_RX
  Top 0.254: U6.45 74.25,59.24 72.5,61 46.5,61 46,61.5 46,62.5 45.5,63 44.5,63 44.41,63.09 U5.4
CAN_SHLD  (via drill 0.4)
  Top 0.254: v5,59.5 5.49,59.5 JP2.6
  Bottom 0.254: JP3.6 20.98,59.5 v5,59.5
CAN_STB  (via drill 0.4)  (1 unrouted)
  Top 0.254: U6.38 77.76,59.76 79,61 79,67.5 76.5,70 60.5,70 v60,69.5 | v39.5,72 39.5,70 40,69.5 40.5,69.5
  Top 0.305: 40.49,69.1 U5.8
  Bottom 0.254: v60,69.5 59.5,70 59.5,72 59,72.5 40,72.5 v39.5,72
CAN_TX
  Top 0.254: U6.46 73.75,58.75 72,60.5 40,60.5 39.5,61 39.5,63.5 39.8,63.8 U5.1
CAN_V+
  Bottom 0.254: JP2.8 6.67,60 19.5,60 20.55,61.05 JP3.8
DCDC_IN  (via drill 0.4, 0.5)
  Top 0.254: v68,16.5 67.5,17 67.5,22 v67,22.5 | v62.5,37 62.5,39 R24.2
  Top 0.305: v64,28.5 v64,30.5
  Bottom 0.254: SOLAR.1 13.5,1.5 63,1.5 63.5,2 63.5,12.1 66,14.6 66,15.5 67,16.5 v68,16.5 | v64,30.5 63,30.5 62.5,31 v62.5,37
  Bottom 0.305: v67,22.5 64,25.5 v64,28.5
  other vias: 8.5,10.5 10,9 6.5,10.5 5,9 5,7 6.5,5.5 10,7 8.5,5.5 6.5,12.5 8.5,12.5 8.5,14.5 8.5,16.5 6.5,16.5 6.5,14.5 4.5,12.5 4.5,16.5 4.5,14.5 10.5,12.5 10.5,14.5 10.5,16.5
  pour Top (no thermals): 1,3 1,48 2,49 11.5,49 15,45.5 15,41 15.9,40.1 22.5,40.1 22.5,29 22,28.5 17,28.5 16.5,28 16.5,22 12.5,18 12.5,3 11.5,2 2,2
  pour Bottom (no thermals): 2.5,2 1,3.5 1,18 2,19 11.5,19 12.5,18 12.5,3 11.5,2
DCDC_OUT  (via drill 0.5)
  Top 0.305: L2.2 64.5,38.95 C20.1
  Top 0.406: C8.+ 62.04,34.54 63.5,36 63.5,38 64,38.5 64.95,38.5 C20.1
  other vias: 44.5,10.5 46.5,10.5 48,9 48,7 43,7 43,9 44.5,5.5 46.5,5.5 46.5,22 45,22 46.5,21 45,21 34,46 36,46 38.5,46 40.5,46 40.5,44 40.5,42 42.5,46 42.5,44 42.5,42 44.5,46 44.5,44 44.5,42 44.5,40 46.5,46 46.5,44 46.5,42 46.5,40 48.5,46 48.5,44 48.5,42 48.5,40 48.5,38 50.5,40 50.5,38 50.5,36 52.5,38 52.5,36 52.5,34 54.5,34 56.5,34 58.5,34 54.5,36 56.5,36 56.5,38 54.5,38 50.5,42 50.5,44 52.5,42 52.5,40 54.5,40 58.5,36 38.5,40
  pour Top (no thermals): 41,34.5 41,3.5 42,2.5 49.5,2.5 50.5,3.5 50.5,9 48,11.5 48,20.5 49,21.5 54.5,21.5 59.5,26.5 62,26.5 63,27.5 63,34.5 50,47.5 33.5,47.5 32.7,46.7 32.7,40.2 35.5,37.5 38,37.5
  pour Bottom (no thermals): 41.5,8.5 44.3,11.3 48.2,11.3 50.5,9 50.5,3.5 49.5,2.5 42.5,2.5 41.5,3.5
  pour Bottom (no thermals): 40,21.8 40,20 41,19 41,16.5 41.5,16 44,16 44.5,16.5 44.5,19 45.5,20 47.5,20 48,20.5 48,22.3 47.5,22.8 41,22.8
  pour Bottom (no thermals): 35,38.5 46,38.5 52,32.5 61.5,32.5 62.5,33.5 62.5,35 60,37.5 59.5,37.5 47.5,49.5 36.5,49.5 33,46 33,40.5
GND  (via drill 0.4, 0.5)  (1 unrouted)
  Top 0.254: v65.6,53.2 65,52.6 65,51.7 64.6,51.3 64.1,51.3 63.1,50.3 61.1,50.3 60.75,50.65 C28.2 60.2,51.2 60.1,51.3 57,51.3 56.2,52.1 56.2,56.4 57,57.2 C27.2 | v65.5,56.5 64.6,57.4 63.9,57.4 63.2,58.1 61.1,58.1 60.5,57.5 | 66.38,52.4 65.8,51.82 v65.8,51.7 | LED1.K 68.38,9.39 D6.C | LED2.K 73.88,9.39 D8.C | USB.5 70.8,5.3 71,5.5 72.5,5.5 v73,5 | D4.2 78.2,17 78.7,16.5 v78.7,16 | R6.1 32.5,25 32.7,24.8 32.7,15.2 32,14.5 32,2.5 33,1.5 62.7,1.5 66,4.8 66,6 64.5,7.5 64.5,9.5 65.5,10.5 65.5,11.5 69.5,15.5 69.5,19 70,19.5 72.15,19.5 R18.2 | R14.1 71.85,21.5 v72.2,22 | R34.1 84.75,17.85 85,17.6 85,15 v84.5,14.5 | v80.5,11.5 79.97,10.97 RESET.2 RESET.4 | U6.23 77.76,47.24 78.5,46.5 78.5,46 79.15,45.35 C30.2 79.6,44.4 v80,44 | U4.2 81,29.4 80.5,28.9 79.5,28.9 79.3,29.1 79.3,29.8 78.9,30.2 78.45,30.2 C23.2 77.65,31 v77,31 | R29.1 66.55,43.85 67.2,44.5 68.7,44.5 69,44.2 U3.2 | v73,42.5 72.5,43 72.5,43.5 72.35,43.65 C11.2 | U6.35 81.26,54.76 81.5,55 83,55 83.35,55.35 C32.2 C33.2 83.35,58.05 83.5,58.2 v83.5,59.4 | U6.47 73.24,57.76 72.5,58.5 70.45,58.5 C31.2 69.45,58.55 v69,59 | C36.2 61,65.95 v61,66.5 60.05,66.5 T2.E | v54.5,69.5 53.6,68.6 C29.2 | IC2.2 59.05,48.5 v58,48.5 | v57,45.5 57.15,45.35 C18.2 | U6.8 69.84,51.74 68.3,50.2 66.6,50.2 66.25,49.85 C34.2 65.2,50.25 v65.2,50.6 | U2.4 9.05,51.8 7.9,51.8 7.55,51.45 C14.2 | v42.5,51.5 43.5,51.5 49,57 50.65,57 C16.2 52.15,58.5 v52.5,58.5 52.5,57.85 NTC1.2 | C9.2 75.75,29.9 v75.7,29.9 | C13.2 74.85,45.35 74.5,45 v74.5,44.5
  Top 0.305: R26.1 C17.2 v63.5,44.9 | R27.1 C18.2 | U3.2 69,42.2 v68.8,42 | U5.2 41.87,61.72 C26.2 40.8,61.5 v40.3,62 | C25.2 v41,71.5 | C39.2 v75.5,5 | R2.2 18.65,26 v20,26 | C9.2 76,28.25 76,24 75.09,23.09 U7.4 | v80,37 C24.2 | JP1.5 JP1.3 45.27,67.27 v45,67 | D3.3 38.8,66.5 v39,66.7 | U2.2 7.05,53.35 C35.2 | C14.2 6.35,51.7 5.8,51.7 5.2,52.3 C35.2 | v3.5,52.5 4.35,53.35 C35.2
  Top 0.406: U1.4 13.6,54.91 14,54.5
  Bottom 0.254: NTC2.2 23.85,41 31.5,41 32.5,42 32.5,47.5 36.1,51.1 42.1,51.1 v42.5,51.5
  Bottom 0.305: 60.5,29.5 67,29.5
  other vias: 16,54.5 24,24 24,26 20,24 22,26 22,24 24,28 28,30 26,26 28,26 26,28 28,28 38,30 30,28 30,30 30,32 26,24 36,34 32,30 32,32 34,32 34,30 38,32 36,30 36,32 67,34 68.5,34 70,34 70,32.5 70,31 70,29.5 82,37 48,71.5 64.5,34.5 14.5,54.5 17.5,54.5 28,24 28,32 26,30 26,32 26,34 28,34 38,34
  pour Bottom (no thermals): 49,74 86.5,74.5 87,-1 66.5,-1 66.5,32 41,57.5 2,57.5 1,58.5 1,74.5
  pour Top (no thermals): 64,32.5 64,36.5 72,36.5 72,28.5 68,28.5
  pour Top (no thermals): 13.5,55 20,55 20,53.5 15,53.5 14.5,53 13.5,53
  pour Bottom (no thermals): 1,56.5 16.5,56.5 17.5,55.5 17.5,45.5 23,40 32.5,40 35,37.5 45.5,37.5 51.5,31.5 61.5,31.5 63,30 63,21 62,20 49.2,20 48.7,20.5 48.7,23 48.2,23.5 27.5,23.5 24,20 1,20
  pour Top (no thermals): 23.5,28 23.5,36.7 28.5,36.7 29.3,36.5 37.5,36.5 40,34 40,29 39.5,28.5 34.5,28.5 32,26 32,23.5 31.5,23 26.5,23 24.5,21 19,21 19,26.5 22,26.5
HB
  Top 0.406: R10.1 17.41,49.15 U1.8
HS_DRV
  Top 0.406: R1.1 16.5,47.25 16.5,50 16.14,50.37 U1.7
I2C1_SCL  (via drill 0.4)
  Top 0.254: U6.42 75.75,61.85 74.3,63.3 72.93,63.3 71.5,64.73 UEXT.5 | R36.1 82.5,62.15 v82.5,62
  Bottom 0.254: v82.5,62 80.89,63.62 72.61,63.62 71.5,64.73 UEXT.5
I2C1_SDA  (via drill 0.4)
  Top 0.254: UEXT.6 70.2,66.47 70.2,64.8 72.2,62.8 74,62.8 75.25,61.55 U6.43 | R35.1 82.5,69.35 v82.5,69.5
  Bottom 0.254: v82.5,69.5 79.5,66.5 72.5,66.5 71.5,67.5 UEXT.6
I2C2_SCL  (via drill 0.4)
  Top 0.254: v79.7,48.2 82.08,48.2 I2C.4 | v77.5,49.7 77.3,49.5 77,49.5 76.75,49.24 U6.21
  Bottom 0.254: v77.5,49.7 77.8,49.7 79.3,48.2 v79.7,48.2
I2C2_SDA  (via drill 0.4)
  Top 0.254: U6.22 77.25,46.65 v77.4,46.5
  Bottom 0.254: v77.4,46.5 81.98,46.5 I2C.3
I_DCDC
  Top 0.254: R20.2 76.5,43.65 | 76.5,43.65 C13.1 | U6.19 75.75,46.85 76.5,46.1 76.5,43.65
I_LOAD
  Top 0.254: C11.1 R11.2 73.85,45.35 75.25,46.75 U6.18
LED1
  Top 0.254: U6.27 83.85,50.75 84.5,50.1 84.5,22 83.1,20.6 81,20.6 79.9,19.5 74,19.5 73,18.5 71.5,18.5 71,18 R42.2 71,17.5
LED2
  Top 0.254: U6.28 84.25,51.26 85,50.5 85,21.6 83.5,20.1 81.3,20.1 80.2,19 74.3,19 73.4,18.1 73.4,17.75 R43.2
LOAD-  (via drill 0.5)
  other vias: 54,5.5 56,5.5 57.5,7 57.5,9 56,10.5 54,10.5 52.5,9 52.5,7 62,14.5 63.5,14.5 60.5,14.5 60.5,13 62,13 59.5,9 61.5,9 59.5,7 61.5,7 61.5,11 59.5,11 61.5,5 59.5,5
  pour Top (no thermals): 63,2.5 52.5,2.5 51.5,3.5 51.5,9.5 53.5,11.5 58,11.5 60,13.5 60,15.5 61.4,15.5 61.4,22 66,22 67,21 67,15.5 65.5,14 65.5,5
  pour Bottom (no thermals): 51.5,3.5 51.5,9.5 59,17 64.5,17 65.5,16 65.5,12.5 63.5,10.5 63.5,4 62,2.5 52.5,2.5
LOAD_G
  Top 0.254: R12.2 60.15,22.75 60.8,22.1 60.8,16.1 60.7,16 Q4.G
LS_DRV
  Top 0.406: R3.1 13.6,48.95 U1.5
N$2
  Top 0.406: C10.1 19.65,50.7 R10.2
N$3
  Top 0.254: R32.2 81.05,15 78.5,15 77.45,16.05 D4.1
N$4
  Top 0.305: D1.C 17,27.07 17,24.5 17.85,23.65 R2.1 19.09,22.55 Q2.G
N$5
  Top 0.254: R45.2 56.05,68 57,68 57.75,67.25 T2.B
N$6
  Top 0.254: U7.7 79.64,25.64 80.5,26.5 81.15,26.5 R22.2 83.35,26.85 84,27.5 84,38 83,39 81.5,39 81,39.5 81,41.9 79.4,43.5 79,43.5 78.5,44 78.5,45 78.15,45.35 R20.1
N$7
  Top 0.254: U6.4 69.75,53.74 69,54.5 69,54.85 R30.1
N$8
  Top 0.254: D4.3 78.55,17.95 79,17.5 79,17 79.85,16.15 R33.2
N$9
  Top 0.305: Q3.G 27.91,36.99 27.6,37.3 23.5,37.3 | 23.5,37.3 23.4,37.3 23,37.7 23,39.8 22.1,40.7 16.8,40.7 | 23.5,37.3 23,36.8 23,35 23,32.5 23,28.5 22,27.5 D1.A
  Top 0.406: 16.8,40.7 15.5,42 15.5,48.65 R3.2
N$10
  Top 0.254: D4.4 74.75,18 75.5,18 75.7,17.8 75.7,15.1 76.5,14.3 76.5,7.5 75.5,6.5 70,6.5 69.5,6 USB.3
N$11
  Top 0.254: R12.1 R9.2 63.65,24.65 64,25 64.9,25 T1.C
N$12
  Top 0.305: R4.2 R5.2 31,38.72 C6.2
N$13
  Top 0.305: C15.1 9.8,56.35 U2.6
N$14
  Top 0.305: C15.2 8.5,56.05 8.5,53 8.05,52.55 U2.3
N$15
  Top 0.254: C27.1 63.79,56.36 Y2.1 63.79,55.21 64,55 66.2,55 66.65,55.45 R30.2
N$16
  Top 0.254: U3.3 68,43.25 68,43 67.25,42.25 R29.2 R28.1
N$17
  Top 0.254: C28.1 63.79,52.04 Y2.4 63.79,52.99 65.3,54.5 67.3,54.5 67.5,54.7 67.5,56.3 67.7,56.5 69,56.5 69.6,55.9 69.6,54.7 70.05,54.25 U6.3
N$18
  Top 0.254: R21.2 80,21.65 R19.1 79,21 79,23 78.6,23 U7.5
N$19
  Top 0.254: R8.1 R14.2 71,23 72,24 73.03,24 U7.3
N$20
  Top 0.406: R1.2 17.1,42.42 Q1.G
N$21
  Top 0.254: R41.1 58.7,65.75 T2.C
N$22
  Top 0.305: U3.1 69.95,42.75 70.2,42.5 71,42.5 71.5,42 C19.1 71.85,41.5 D11.C
N$23
  Top 0.254: R22.1 80.65,25.15 79.86,24.36 U7.6 77.36,24.36 76.5,23.5 76.5,21.4 76.1,21 R18.1
N$24
  Top 0.254: R16.2 63,25 64,26 65,26 65.95,26.95 T1.B 66.5,27.65 R13.2
N$25
  pour Top (no thermals): 69.8,41.4 70.6,41.4 70.6,40.5 71,40.5 71.5,40 78,40 78.5,39.5 78.5,38.5 72.5,38.5 72.5,37.5 72,37 70,37 69.8,37.3
N$26
  pour Top (no thermals): 66.5,37.5 69.2,37.5 69.2,41.3 66,41.3 66,38
N$27
  Top 0.254: D4.6 74.7,14.8 76,13.5 76,8 75,7 69.5,7 68.85,6.35 USB.2
N$28
  Top 0.305: C38.1 82,32.55 U4.4
N$29
  Top 0.254: USB.4 70.15,5.65 70.5,6 76,6 77,7 77,13.5 77.7,14.2 81.4,14.2 82.2,15 83.7,15 84,15.3 R34.2
N$30
  Top 0.305: USB.Z1 USB.Z2 USB.Z3 USB.Z4 74.12,2.15 C39.1
N$36  (via drill 0.4)
  Top 0.254: R15.2 71.56,26.91 U7.1 73.4,27.4 74,28 v75,28 | v80,28 83,28 83.5,28.5 83.5,37.5 82.5,38.5 81,38.5 80.5,39 80.5,41.5 79.5,42.5 74.65,42.5 R11.1
  Bottom 0.254: v75,28 v80,28
N$40  (via drill 0.4)
  Top 0.305: JP4.1 34.73,63.77 v34,64.5 | v34,68.5 34,69.42 R31.2
  Bottom 0.305: v34,64.5 v34,68.5
N$43
  Top 0.254: LED1.A 66.62,9.39 D6.A | D6.A 66.65,11.03 | D6.A 66.62,11.62 67,12 70,12 71,13 R42.1
N$46
  Top 0.254: D8.A 72.15,11.03 | LED2.A 72.12,9.39 D8.A | D8.A 72.12,12.62 73,13.5 R43.1
N$99
  Top 0.254: R7.1 R15.1 71.15,24.65 72,25.5 73.27,25.5 U7.2
OSC_IN
  Top 0.254: U6.5 68.75,53.26 68.42,53.6
OSC_OUT
  Top 0.254: U6.6 69.25,52.75 69,52.5 69,51.78 68.42,51.2
REF_I_DCDC  (via drill 0.4)
  Top 0.254: R21.1 81.65,23.5 v83.5,23.5 | v83.5,50 81.5,50 80.5,49 79,49 78.4,49.6 78.4,49.9 77.8,50.5 74.4,50.5 73.24,49.34 U6.14
  Bottom 0.254: v83.5,23.5 84,24 84,49.5 v83.5,50
SOLAR-  (via drill 0.5)
  other vias: 16,10.5 14.5,9 14.5,7 16,5.5 18,5.5 19.5,7 19.5,9 18,10.5 16,12.5 16,14.5 16,16.5 16,18.5 18,12.5 18,14.5 20,12.5 22,12.5 22,14.5 20,14.5
  pour Top (no thermals): 14.5,2 13.5,3 13.5,18 15.6,20.1 23.4,20.1 24.5,19 24.5,13.5 22,11 22,3 21,2
  pour Bottom (no thermals): 14.5,2.5 13.5,3.5 13.5,18 14.5,19 23.5,19 24.5,18 24.5,13.5 22,11 22,3.5 21,2.5
SPI1_MISO
  Top 0.254: UEXT.7 76.75,62.52 U6.40
SPI1_MOSI
  Top 0.254: UEXT.8 72.8,66.53 72.8,64.4 73.3,63.9 74.5,63.9 76.26,62.14 U6.41
SPI1_SCK
  Top 0.254: UEXT.9 77.25,64.4 U6.39
SSEL  (via drill 0.4)
  Top 0.254: U6.10 72.45,50.75 73.5,51.8 73.5,53 74.1,53.6 v76.8,53.6 | v78,61.5 78,66.5 76.73,67.77 UEXT.10
  Bottom 0.254: v76.8,53.6 78,54.8 v78,61.5
SW_NODE  (via drill 0.5)
  Top 0.305: C6.1 30.95,42 28.5,42
  Top 0.406: U1.6 14.87,52.56 15.3,53 19.05,53 C10.2 19.65,52.5 20.5,52.5 v22.5,50.5
  other vias: 27,50.5 25.5,50.5 24,50.5 21,49 27,47.5 22.5,49 25.5,49 30,49 19.5,46 19.5,44.5 27,49 28.5,49 28.5,47.5 28.5,46 28.5,44.5 30,44.5 30,46 30,47.5 28.5,50.5
  pour Top (no thermals): 17.5,41.3 22.3,41.3 23.6,40.1 23.6,37.9 28.4,37.9 28.9,38.4 28.9,38.9 29.5,39.5 29.5,43 30,43.5 31.5,43.5 32,44 32,50 29,53 20.5,53 20.5,47.5 17.5,47.5
  pour Bottom (no thermals): 18.5,46 23.5,41 31.5,41 32,41.5 32,50 30,52 19.5,52 18.5,51
SWCLK
  Top 0.254: U6.37 78.24,59.24 79.5,60.5 79.5,67.9 76.9,70.5 53.5,70.5 52.5,69.5 52.5,67.5 52.27,67.27 JP1.4
SWDIO
  Top 0.254: U6.34 78.85,54.25 78.5,54.6 78.5,55.5 78.8,55.8 78.8,58.8 80,60 80,68.2 77.2,71 53,71 51.41,69.41 JP1.2
TEMP  (via drill 0.4)
  Top 0.254: U6.11 70.34,50.24 70,49.9 70,49.4 68.4,47.8 62.7,47.8 v62.3,48.2 | v55.5,48.5 54.5,49.5 53.5,49.5 52,51 52,54 52.35,54.35 R23.1 NTC1.1 C16.1 48.65,55.65 v43.5,50.5
  Bottom 0.254: v62.3,48.2 60.2,48.2 59.5,47.5 56.5,47.5 v55.5,48.5 | NTC2.1 24.35,40.5 32,40.5 33,41.5 33,47 36.5,50.5 v43.5,50.5
TIM1_CH1  (via drill 0.4)
  Top 0.254: U6.29 78.76,51.74 78.5,52 78.5,53.8 77.3,55 v73,55 | U1.2 16.14,58.13 16.5,58.5 40.5,58.5 41.5,59.5 66.2,59.5 66.7,59 v66.7,58.5
  Bottom 0.254: v73,55 71,55 68.4,57.6 68.4,57.9 67.8,58.5 v66.7,58.5
TIM1_CH1N  (via drill 0.4)
  Top 0.254: U6.26 78.76,50.24 78.6,50.4 78.6,51.1 78,51.7 78,53.5 77.1,54.4 73.5,54.4 v73,53.9 | U1.3 14.87,58.37 15.5,59 40,59 41,60 67,60 67.5,59.5 v67.5,57.5
  Bottom 0.254: v73,53.9 71.1,53.9 v67.5,57.5
USART1_RX
  Top 0.254: U6.31 81.15,52.75 81.6,52.3 83.9,52.3 84.5,52.9 84.5,69 82,71.5 52.5,71.5 51.8,70.8 50,70.8 49.5,70.3 49.5,65 49.77,64.73 JP1.8
USART1_TX  (via drill 0.4)
  Top 0.254: U6.30 80.75,52.25 81.2,51.8 84.1,51.8 85,52.7 85,69.5 82.5,72 51.4,72 v51,71.6 | v50.5,70 50,69.5 50,66.5 50.5,66 JP1.6
  Bottom 0.254: v51,71.6 51,70.5 v50.5,70
USART2_RX  (via drill 0.4)
  Top 0.254: UEXT.4 67.7,66.51 67.7,64.4 68.3,63.8 68.9,63.8 70.6,62.1 73.5,62.1 v74,61.6 | U6.13 72.76,49.56 75,51.8 v75.3,51.8
  Bottom 0.254: v75.3,51.8 75.3,53.2 75,53.5 75,60.6 v74,61.6
USART2_TX  (via drill 0.4)
  Top 0.254: UEXT.3 | U6.12 72.26,49.76 74.5,52 v74.5,52.6 | 68.96,65.04 UEXT.3 | v70.9,62.9 68.96,64.84 UEXT.3
  Bottom 0.254: v74.5,52.6 74.5,59.3 v70.9,62.9
USB_DM  (via drill 0.4)
  Top 0.254: v83.4,53.1 83.24,53.26 U6.32 | R32.1 82.5,18.35 82.5,19 83,19.5 v84,19.5
  Bottom 0.254: v84,19.5 84.5,20 84.5,52 v83.4,53.1
USB_DP  (via drill 0.4)
  Top 0.254: v82.5,54 82.25,53.74 U6.33 | R33.1 81.35,19.2 v81.7,19.2
  Bottom 0.254: v82.5,54 82.66,53.84 83.75,53.84 85,52.6 85,19 84.7,18.7 82.2,18.7 v81.7,19.2
V_BAT
  Top 0.254: U6.16 74.25,47.35 73.8,46.9 70,46.9 69.3,46.2 62.7,46.2 62,45.5 59.85,45.5 58.85,44.5 C18.1
  Top 0.305: C18.1 R27.2 R25.1
V_REF  (via drill 0.4)
  Top 0.254: R37.1 61.15,47 | v71.9,48 71.3,47.4 69.6,47.4 68.9,46.7 61.05,46.7 R37.1 | IC2.1 59.2,46.65 R37.1 | U6.15 73.75,49.15 74.3,49.7 v74.7,49.7
  Bottom 0.254: v71.9,48 73,48 v74.7,49.7
V_SOLAR
  Top 0.254: C17.1 60.65,44.15 61.5,45 62.5,45 63.2,45.7 69.7,45.7 70.3,46.3 74,46.3 74.74,47.04 U6.17
  Top 0.305: 60.5,44 C17.1 R26.2 R24.1
VDDA
  Top 0.254: L4.1 65.4,48.3 67.7,48.3 67.95,48.55 C34.1 68.25,49.5 68.5,49.5 70.25,51.26 U6.9

## Text on the board
tPlace: CAN | Libre / Solar | Libre Solar / MPPT charger | V0.6 (12/2016) | Made in Fabulous St. Pauli | CC BY-SA | Design: Martin Jäger | http://libre.solar
bNames: - | + | + | - | - | +
tDocu: PCB layout for Phoenix Contact DIN rail housing: / - Tray: EH 90 F-B/ABS BK9005 / - Cover: EH 90 F-C SS/ABS BK9005 | Housing walls | Housing walls